# EAGLE board Schematic (EAGLE 9.6.2)
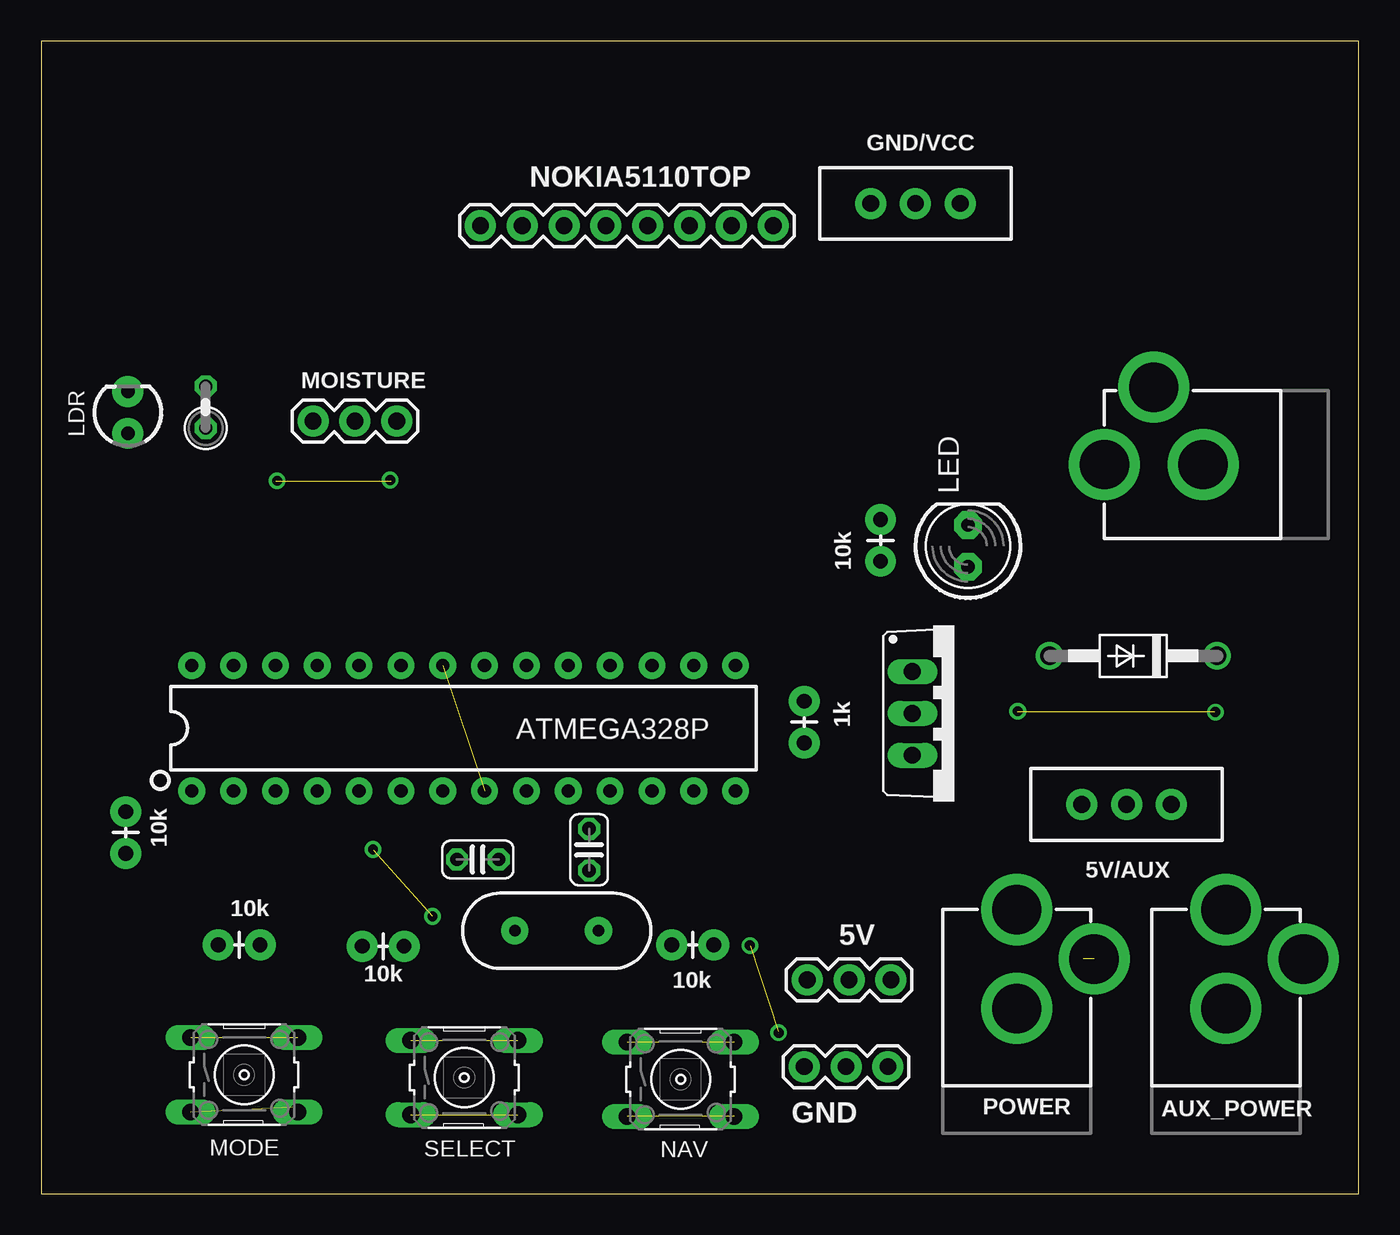
[diagram p0: board, top side]
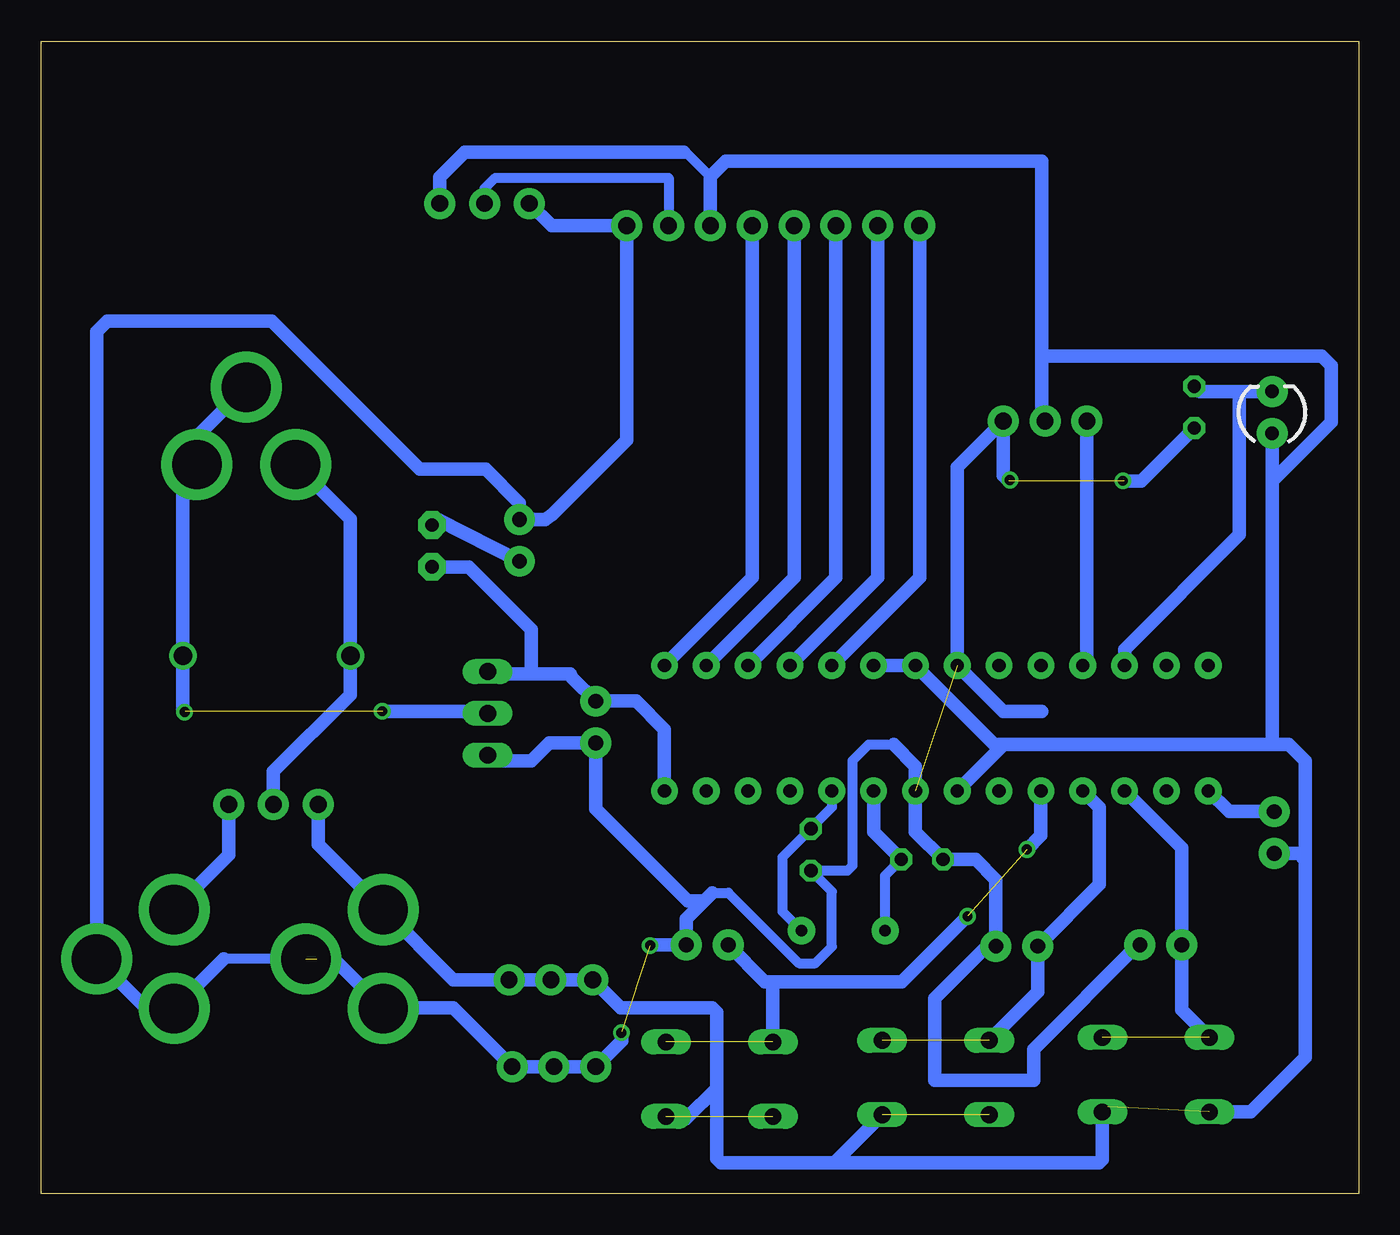
[diagram p1: board, bottom side, seen from below]

Size 80 x 70 mm. Coordinates in mm from the lower left corner, seen from the top.
Outline: 0,0 80,0 80,70 0,70 0,0
Copper layers (1*16): Top 0.035mm / dielectric 1.5mm / Bottom 0.035mm
Design rules "default": minimum track width 6mil, minimum drill 0.35mm, track to track 6mil, track to pad 6mil, pad to pad 6mil, via to via 6mil, smd to smd 6mil, copper to edge 40mil, drill to drill 6mil, minimum pad ring 10mil, minimum via ring 8mil, stop-mask expansion 4mil, vias tented up to drill 0mil, thermal gap 10mil

## Footprints (pad centres in the part's own frame; a part is rotated, then mirrored left to right if it is on the bottom)
1X03 = drill 1.016 pad 1.88: 1 0,0; 2 2.54,0; 3 5.08,0
SWITCH_SPDT_PTH_11.6X4.0MM_LOCK = drill 1.016 pad 1.88: 1 0,2.718; 2 0,0; 3 0,-2.718
DIP28 = drill 0.813 pad 1.626: 1 -16.51,-3.81; 2 -13.97,-3.81; 3 -11.43,-3.81; 4 -8.89,-3.81; 5 -6.35,-3.81; 6 -3.81,-3.81; 7 -1.27,-3.81; 8 1.27,-3.81; 9 3.81,-3.81; 10 6.35,-3.81; 11 8.89,-3.81; 12 11.43,-3.81; 13 13.97,-3.81; 14 16.51,-3.81; 15 16.51,3.81; 16 13.97,3.81; 17 11.43,3.81; 18 8.89,3.81; 19 6.35,3.81; 20 3.81,3.81; 21 1.27,3.81; 22 -1.27,3.81; 23 -3.81,3.81; 24 -6.35,3.81; 25 -8.89,3.81; 26 -11.43,3.81; 27 -13.97,3.81; 28 -16.51,3.81
POWER_JACK_PTH = drill 2.997 pad 4.318: GND 0,7.7; GNDBREAK 4.7,10.7; PWR 0,13.7
C025-024X044 = drill 0.813 octagon: 1 -1.27,0; 2 1.27,0
DO41-10 = drill 1.118: A 5.08,0; C -5.08,0
LED_3MM = drill 0.813 pad 1.88: A -1.27,0; K 1.27,0
LED5MM = drill 0.813 pad 1.676 octagon: A -1.27,0; K 1.27,0
B3F-10XX = drill 1.016 long: 1 -3.251,2.261; 2 3.251,2.261; 3 -3.251,-2.261; 4 3.251,-2.261
1X08 = drill 1.016 pad 1.88: 1 0,0; 2 2.54,0; 3 5.08,0; 4 7.62,0; 5 10.16,0; 6 12.7,0; 7 15.24,0; 8 17.78,0
TO220BV = drill 1.016 long: D 0,-2.54; G -2.54,-2.54; S 2.54,-2.54
AXIAL-0.1 = drill 0.9 pad 1.88: P$1 -1.27,0; P$2 1.27,0
0207/2V = drill 0.813 octagon: 1 -1.27,0; 2 1.27,0
HC49US = drill 0.7 pad 1.651: 1 -2.54,0; 2 2.54,0

## Placement (x,y rotation side)
5V  [1X03]  46.51,12.99 0 top
5V/AUX  [SWITCH_SPDT_PTH_11.6X4.0MM_LOCK]  65.9,23.64 90 top
ATMEGA328P  328P  [DIP28]  25.65,28.27 0 top
AUX_POWER  POWER_JACK  [POWER_JACK_PTH]  71.93,3.55 0 top
C1  22pf  [C025-024X044]  26.51,20.3 180 top
C2  22pf  [C025-024X044]  33.27,20.89 270 top
D1  1N4007  [DO41-10]  66.31,32.66 180 top
GND  [1X03]  51.41,7.71 180 top
GND/VCC  [SWITCH_SPDT_PTH_11.6X4.0MM_LOCK]  53.08,60.14 90 top
LDR  [LED_3MM]  5.27,47.45 90 top
LED  [LED5MM]  56.27,39.34 90 top
MODE  [B3F-10XX]  12.32,7.22 0 top
MOISTURE  [1X03]  16.51,46.93 0 top
NAV  [B3F-10XX]  38.82,6.95 0 top
NOKIA5110TOP  [1X08]  44.45,58.79 180 top
POWER  POWER_JACK  [POWER_JACK_PTH]  59.23,3.55 0 top
Q1  IRF520  [TO220BV]  55.43,29.17 270 top
R2  10k  [AXIAL-0.1]  50.96,39.68 270 top
R3  10k  [AXIAL-0.1]  39.56,15.1 0 top
R4  10k  [AXIAL-0.1]  20.76,15.03 0 top
R5  10k  [AXIAL-0.1]  12.02,15.1 0 top
R6  10k  [0207/2V]  9.99,47.77 90 top
R7  10k  [AXIAL-0.1]  5.13,21.93 90 top
R8  1k  [AXIAL-0.1]  46.33,28.64 90 top
SELECT  [B3F-10XX]  25.69,7.05 0 top
WATER_PUMP  WATER_PUMP  [POWER_JACK_PTH]  78.25,44.28 90 top
Y1  16MHz  [HC49US]  31.3,15.97 180 top

## Library data of the parts
5V GND MOISTURE = SparkFun-Connectors
5V/AUX GND/VCC = SparkFun-Switches; PROD_ID: SWCH-08261; SF_SKU: COM-00102
ATMEGA328P = SparkFun-IC-Microcontroller; PROD_ID: IC-09136
AUX_POWER POWER WATER_PUMP = SparkFun-Connectors; PROD_ID: CONN-08197
C1 C2 = rcl; SPICEPREFIX: C
D1 = diode
LDR = SparkFun-LED; PROD_ID: DIO-08794
LED = adafruit
MODE NAV SELECT = switch-omron; MPN: B3F-1000; OC_FARNELL: 176432; OC_NEWARK: 36M3542
NOKIA5110TOP = SparkFun-Connectors; PROD_ID: CONN-08438
Q1 = transistor-power
R2 = SparkFun-Resistors; PROD_ID: RES-09435
R3-R5 R7 = SparkFun-Resistors; PROD_ID: RES-08375
R6 = rcl; SPICEPREFIX: R
R8 = SparkFun-Resistors; PROD_ID: RES-09769
Y1 = SparkFun-Clocks; PROD_ID: XTAL-08181; SF_ID: COM-00536

## Nets
5V: 5V.1 5V.2 5V.3 5V/AUX.1 ATMEGA328P.7 ATMEGA328P.20 ATMEGA328P.21 GND/VCC.3 LDR.A MODE.3 MODE.4 MOISTURE.2 NAV.3 NAV.4 NOKIA5110TOP.3 POWER.PWR R7.P$1 SELECT.3 SELECT.4
A0: ATMEGA328P.23
A1: ATMEGA328P.24
A2: ATMEGA328P.25 MOISTURE.1
A3: ATMEGA328P.26 LDR.K R6.2
A4: ATMEGA328P.27
A5: ATMEGA328P.28
D0: ATMEGA328P.2
D1: ATMEGA328P.3 MODE.1 MODE.2 R5.P$1
D2: ATMEGA328P.4 R4.P$1 SELECT.1 SELECT.2
D3: ATMEGA328P.5 NAV.1 NAV.2 R3.P$1
D4: ATMEGA328P.6
D5: ATMEGA328P.11
D6: ATMEGA328P.12
D7: ATMEGA328P.13
D8: ATMEGA328P.14 LED.A Q1.G R8.P$2
D9: ATMEGA328P.15 NOKIA5110TOP.4
D10: ATMEGA328P.16 NOKIA5110TOP.5
D11: ATMEGA328P.17 NOKIA5110TOP.6
D12: ATMEGA328P.18 NOKIA5110TOP.7
D13: ATMEGA328P.19 NOKIA5110TOP.8
GND: ATMEGA328P.8 ATMEGA328P.22 AUX_POWER.GND AUX_POWER.GNDBREAK C1.2 C2.2 GND.1 GND.2 GND.3 GND/VCC.1 MOISTURE.3 NOKIA5110TOP.1 POWER.GND POWER.GNDBREAK Q1.S R2.P$1 R3.P$2 R4.P$2 R5.P$2 R6.1 R8.P$1
LIGHT: GND/VCC.2 NOKIA5110TOP.2
N$3: LED.K R2.P$2
N$4: ATMEGA328P.9 C1.1 Y1.2
N$5: ATMEGA328P.10 C2.1 Y1.1
N$6: ATMEGA328P.1 R7.P$2
WP+: 5V/AUX.2 D1.A WATER_PUMP.PWR
WP-: D1.C Q1.D WATER_PUMP.GND WATER_PUMP.GNDBREAK
WPAUX: 5V/AUX.3 AUX_POWER.PWR

## Tracks (layer width: path | path; a pad name or v marks a point on that pad's centre or on a via)
5V  (3 unrouted)
  Bottom 0.61: 41,63.25 40.85,63.25 39.37,61.77 | NAV.4 42.48,4.69 42.63,4.54
  Bottom 0.813: ATMEGA328P.20 ATMEGA328P.21 22.12,27.28 21.56,27.28 | 5V/AUX.1 63.18,21.2 POWER.PWR 54.97,12.99 5V.3 5V.2 5V.1 44.8,11.28 39.25,11.28 38.99,11.02 38.99,6.41 | 38.99,6.41 40.86,4.54 42.63,4.54 | 15.25,5.28 MODE.4 15.57,2.05 15.75,1.87 31.86,1.87 | MODE.3 6.57,4.96 3.25,8.28 3.25,20.28 | 3.25,20.28 3.63,20.66 R7.P$1 | 3.25,20.28 3.25,26.28 4.25,27.28 5.25,27.28 | 5.25,27.28 21.56,27.28 | 21.56,27.28 ATMEGA328P.7 | 5.25,27.28 5.25,43.28 | 5.25,43.28 5.25,46.16 LDR.A | 5.25,43.28 1.67,46.86 1.67,50.28 2.25,50.86 19.25,50.86 | NOKIA5110TOP.3 39.37,61.77 38.43,62.71 19.25,62.71 19.25,50.86 | 41,63.25 54.29,63.25 55.8,61.74 GND/VCC.3 | 19.25,50.86 19.25,47.13 MOISTURE.2 | 38.99,6.41 38.99,2.11 38.75,1.87 31.86,1.87 | 31.86,1.87 SELECT.4
A2
  Bottom 0.813: MOISTURE.1 16.51,32.33 ATMEGA328P.25
A3
  Bottom 0.813: LDR.K 7.25,48.72 | 7.25,48.72 9.67,48.72 R6.2 | 7.25,48.72 7.25,40.03 14.22,33.06 ATMEGA328P.26
D1  (1 unrouted)
  Bottom 0.813: MODE.1 10.75,11.16 R5.P$1 10.75,20.99 ATMEGA328P.3
D2  (1 unrouted)
  Bottom 0.813: SELECT.1 19.49,12.26 R4.P$1 15.75,18.77 15.75,23.45 ATMEGA328P.4
D3  (2 unrouted)
  Bottom 0.813: R3.P$1 36.06,12.87 35.75,12.87 | 35.75,12.87 27.75,12.87 23.75,16.87 | ATMEGA328P.5 19.3,21.75 20.17,20.88 | NAV.1 35.57,12.69 35.75,12.87
D8
  Bottom 0.813: Q1.G 52.73,31.55 50.25,31.55 | 50.25,31.55 47.89,31.55 47.72,31.3 R8.P$2 43.88,29.91 42.16,28.19 ATMEGA328P.14 | 50.25,31.55 50.25,34.28 54.04,38.07 LED.A
D9
  Bottom 0.813: NOKIA5110TOP.4 36.83,37.41 ATMEGA328P.15
D10
  Bottom 0.813: NOKIA5110TOP.5 34.29,37.41 ATMEGA328P.16
D11
  Bottom 0.813: NOKIA5110TOP.6 31.75,37.41 ATMEGA328P.17
D12
  Bottom 0.813: NOKIA5110TOP.7 29.21,37.41 ATMEGA328P.18
D13
  Bottom 0.813: NOKIA5110TOP.8 26.67,37.41 ATMEGA328P.19
GND  (4 unrouted)
  Bottom 0.61: 28.25,27.28 29.76,27.28 30.73,26.31 30.73,19.93 31.04,19.62 C2.2 32,18.35 32,15 33,14 34,14 38.28,18.28 39.25,18.28 | POWER.GND 59.25,11.28 | 62.23,14.25 POWER.GNDBREAK 68.93,14.25
  Bottom 0.813: 63.28,14.25 63.25,14.28 | 39.75,17.78 40.83,16.7 R3.P$2 43.02,15.1 43.06,15.06 | 39.75,17.78 39.25,18.28 | R5.P$2 13.43,15.1 19.75,8.78 19.75,6.87 25.75,6.87 25.75,11.87 22.59,15.03 R4.P$2 22.03,19.06 23.27,20.3 C1.2 26.92,21.98 ATMEGA328P.8 26.92,25.95 28.25,27.28 | 59.25,11.28 54.98,11.28 GND.1 GND.2 GND.3 44.75,9.29 44.75,9.87 | 62.23,14.25 POWER.GND | 68.93,14.25 AUX_POWER.GND 73.63,11.25 AUX_POWER.GNDBREAK 76.63,52.37 76,53 66,53 57,44 53,44 50.96,41.96 R2.P$1 49.4,40.95 48.94,41.28 44.45,45.77 NOKIA5110TOP.1 49.01,58.79 GND/VCC.1 | Q1.S 52.54,26.28 50.25,26.28 49.16,27.37 R8.P$1 46.33,23.36 40.75,17.78 39.75,17.78 | R6.1 13.21,43.28 14.25,43.28 | 21.25,43.28 21.59,43.62 MOISTURE.3 24.38,44.14 ATMEGA328P.22 21.58,29.28 19.25,29.28
LIGHT
  Bottom 0.61: GND/VCC.2 53.08,61.06 52.43,61.71 41.91,61.71 NOKIA5110TOP.2
N$1  (via drill 0.6)
  other vias: 20.15,20.91
N$2  (via drill 0.6)
  other vias: 23.76,16.84
N$3
  Bottom 0.813: R2.P$2 55.93,40.95 LED.K
N$4
  Bottom 0.61: Y1.2 28.76,19.32 C1.1
  Bottom 0.813: C1.1 29.46,21.98 ATMEGA328P.9
N$5
  Bottom 0.61: ATMEGA328P.10 32,23.46 33.27,22.19 C2.1 35,20.43 35,17.13 Y1.1
N$6
  Bottom 0.813: ATMEGA328P.1 7.88,23.2 R7.P$2
N$7  (via drill 0.6)
  other vias: 43.03,15.07
N$8  (via drill 0.6)
  other vias: 44.77,9.77
N$9  (via drill 0.6)
  other vias: 14.33,43.3
N$10  (via drill 0.6)
  other vias: 21.19,43.34
N$11  (via drill 0.6)
  other vias: 59.29,29.3
N$12  (via drill 0.6)
  other vias: 71.29,29.25
WP+
  Bottom 0.813: 5V/AUX.2 65.9,25.63 61.23,30.3 D1.A 61.23,40.96 WATER_PUMP.PWR
WP-  (1 unrouted)
  Bottom 0.813: WATER_PUMP.GNDBREAK 70.55,45.98 WATER_PUMP.GND 71.39,43.44 D1.C 71.39,29.42 71.25,29.28 | Q1.D 53,29.28 59.25,29.28
WPAUX
  Bottom 0.813: AUX_POWER.PWR 68.62,20.56 5V/AUX.3